# EAGLE board rev2ctrl (EAGLE 7.4.0)
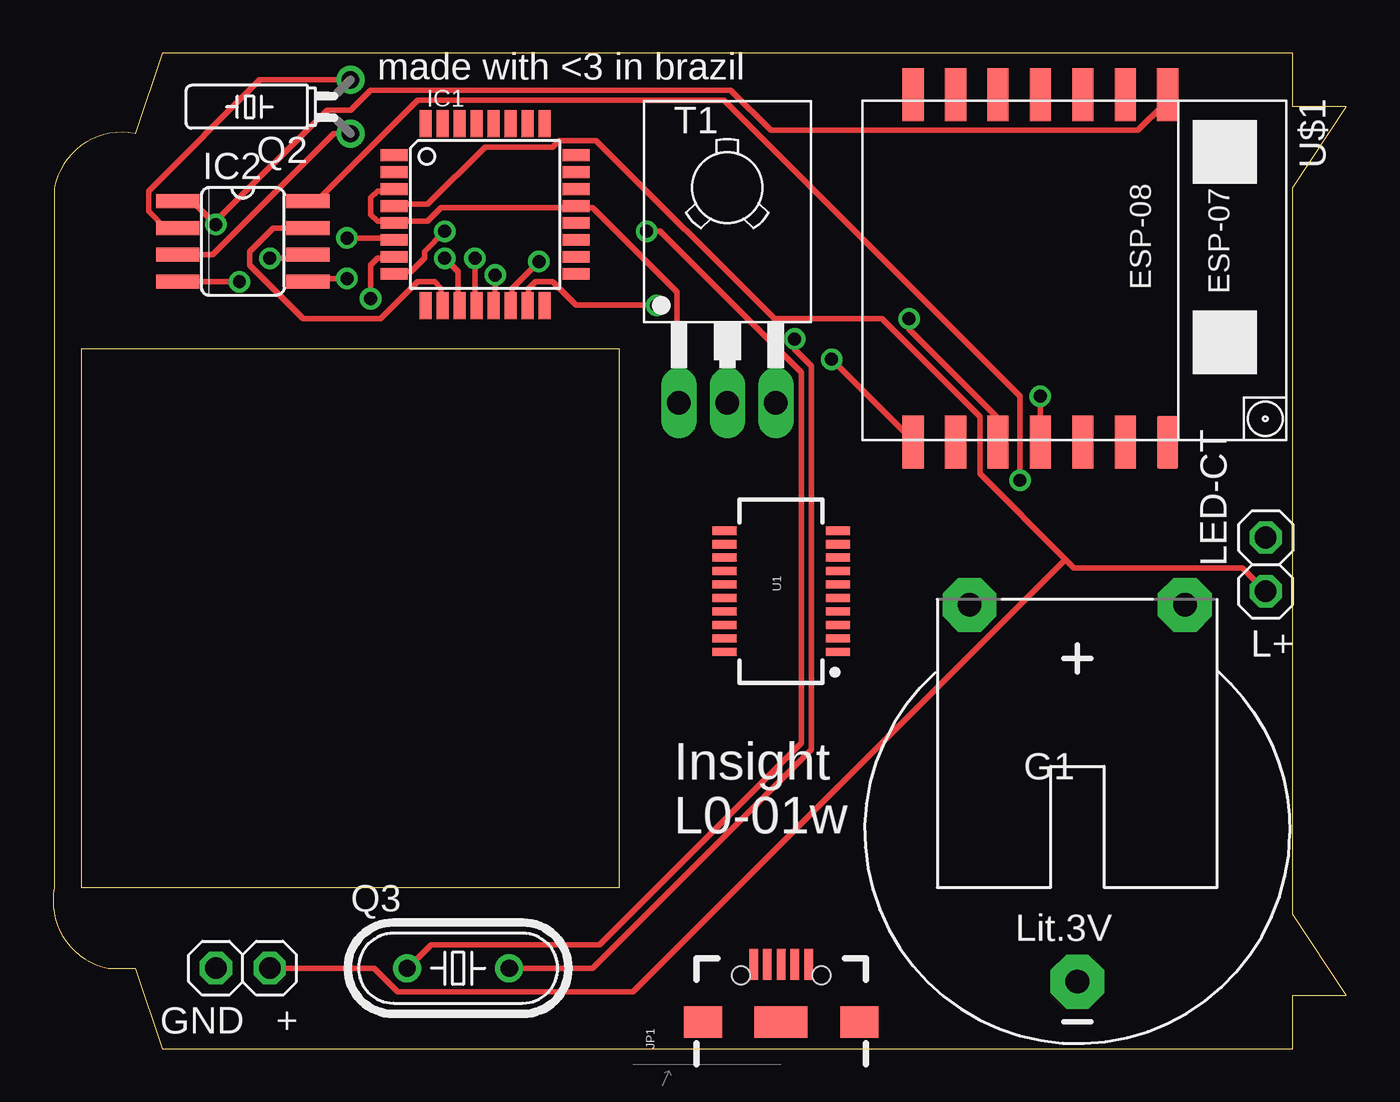
[diagram p0: board, top side]
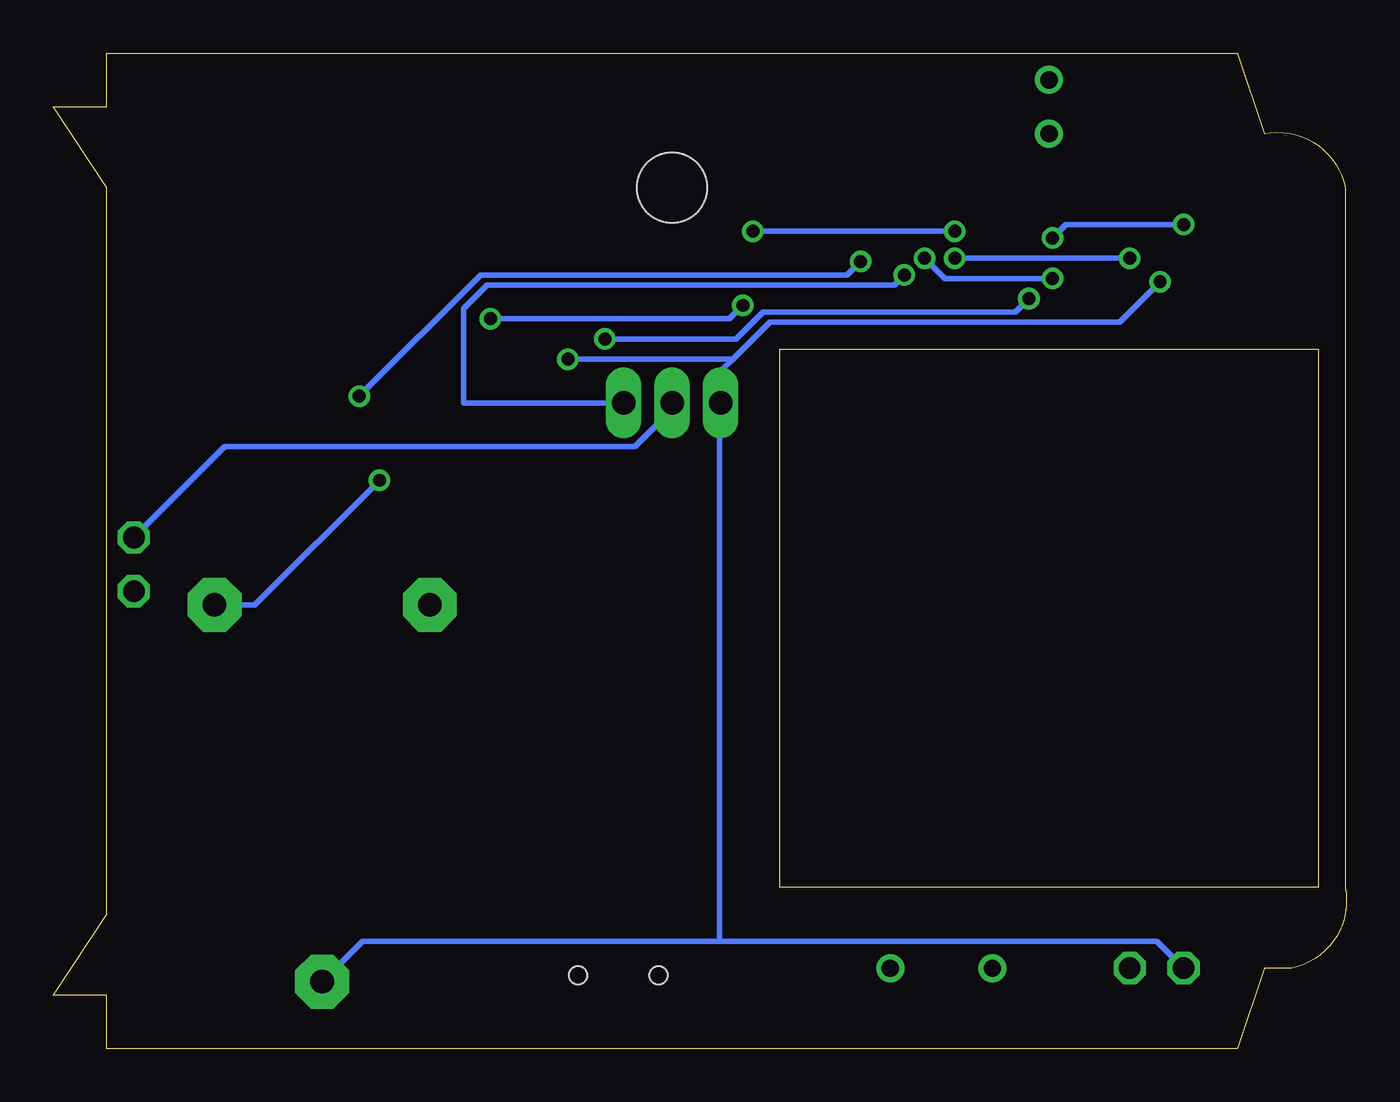
[diagram p1: board, bottom side, seen from below]

Size 61.02 x 46.99 mm. Coordinates in mm from the lower left corner, seen from the top.
Outline: 58.48,46.99 5.14,46.99 3.87,43.18 arc90 0.06,40.64 0.06,7.62 arc90 2.6,3.81 3.87,3.81 5.14,0 58.48,0 58.48,2.54 61.02,2.54 58.48,6.35 58.48,40.64 61.02,44.45 58.48,44.45 58.48,46.99
Copper layers (1*16): Top 0.035mm / dielectric 1.5mm / Bottom 0.035mm
Design rules "default": minimum track width 10mil, minimum drill 24mil, track to track 8mil, track to pad 8mil, pad to pad 8mil, via to via 8mil, smd to smd 8mil, copper to edge 40mil, drill to drill 8mil, minimum pad ring 10mil, minimum via ring 8mil, stop-mask expansion 4mil, vias tented up to drill 0mil, thermal gap 10mil

## Footprints (pad centres in the part's own frame; a part is rotated, then mirrored left to right if it is on the bottom)
1X01 = drill 1.016 octagon: 1 0,0
CR2032H = drill 1.118 pad 2.54 octagon: + 5.08,10.795; +@1 -5.08,10.795; - 0,-6.985
TQFP32-08 = smd 1.27 x 0.559: 1 -4.293,2.8; 2 -4.293,2; 3 -4.293,1.2; 4 -4.293,0.4; 5 -4.293,-0.4; 6 -4.293,-1.2; 7 -4.293,-2; 8 -4.293,-2.8; 17 4.293,-2.8; 18 4.293,-2; 19 4.293,-1.2; 20 4.293,-0.4; 21 4.293,0.4; 22 4.293,1.2; 23 4.293,2; 24 4.293,2.8 | smd 0.559 x 1.27: 9 -2.8,-4.293; 10 -2,-4.293; 11 -1.2,-4.293; 12 -0.4,-4.293; 13 0.4,-4.293; 14 1.2,-4.293; 15 2,-4.293; 16 2.8,-4.293; 25 2.8,4.293; 26 2,4.293; 27 1.2,4.293; 28 0.4,4.293; 29 -0.4,4.293; 30 -1.2,4.293; 31 -2,4.293; 32 -2.8,4.293
SO08 = smd 0.66 x 2.032: 1 -1.905,-3.073; 2 -0.635,-3.073; 3 0.635,-3.073; 4 1.905,-3.073; 5 1.905,3.073; 6 0.635,3.073; 7 -0.635,3.073; 8 -1.905,3.073
USB-B-MICRO-SMD_V03 = smd 1.45 x 0.4: D+1 2.725,0; D-1 2.725,0.65; GND1 2.725,-1.3; ID1 2.725,-0.65; VBUS1 2.725,1.3 | smd 1.5 x 1.8: SHIELD1 0,3.685; SHIELD2 0,-3.685 | smd 1.5 x 2.5: SHIELD3 0,0 | hole 0.85: 2.2,1.9; 2.2,-1.9
TC26H = drill 0.813: 1 -1.27,0; 2 1.27,0
HC49/S = drill 0.813: 1 -2.413,0; 2 2.413,0
TO126 = drill 1.118 long: 1 -2.286,-5.08; 2 0,-5.08; 3 2.286,-5.08 | hole 3.302: 0,5.08
SSOP20_L = smd 0.381 x 1.143: 1 -2.857,-2.68; 2 -2.223,-2.68; 3 -1.587,-2.68; 4 -0.953,-2.68; 5 -0.318,-2.68; 6 0.318,-2.68; 7 0.953,-2.68; 8 1.587,-2.68; 9 2.223,-2.68; 10 2.857,-2.68; 11 2.857,2.68; 12 2.223,2.68; 13 1.587,2.68; 14 0.953,2.68; 15 0.318,2.68; 16 -0.318,2.68; 17 -0.953,2.68; 18 -1.587,2.68; 19 -2.223,2.68; 20 -2.857,2.68
ESP07 = smd 2.5 x 1: ANT 8.2,6.8; CH_PD 8.2,4.8; GND 8.2,-5.2; GPIO0 -8.2,-5.2; GPIO2 -8.2,-3.2; GPIO12 -8.2,2.8; GPIO13 -8.2,0.8; GPIO14 -8.2,4.8; GPIO15 -8.2,-1.2; GPIO16 8.2,2.8; NC 8.2,-3.2; RX 8.2,0.8; TX 8.2,-1.2; VCC -8.2,6.8

## Placement (x,y rotation side)
+  [1X01]  10.22,3.81 180 top
G1  CR2032H  [CR2032H]  48.32,10.16 0 top
GND  [1X01]  7.68,3.81 180 top
IC1  MEGA8-AI  [TQFP32-08]  20.38,39.37 0 top
IC2  DS1621S  [SO08]  8.95,38.1 270 top
JP1  [USB-B-MICRO-SMD_V03]  34.35,1.27 90 top
L+  [1X01]  57.21,21.59 180 top
LED-CT  [1X01]  57.21,24.13 90 top
Q2  [TC26H]  14.03,44.45 90 top
Q3  [HC49/S]  19.11,3.81 0 top
T1  BD677  [TO126]  31.81,35.56 0 top
U1  FTS31XS-U  [SSOP20_L]  34.35,21.59 90 top
U$1  ESP07  [ESP07]  45.78,36.83 270 top

## Library data of the parts
+ GND L+ LED-CT = pinhead
G1 = battery
IC1 = atmel; MPN: ATMEGA8-16AU; OC_FARNELL: 9171371; OC_NEWARK: 73M8863
IC2 = maxim; MF: DALLAS SEMICONDUCTOR; MPN: DS1621S+; OC_FARNELL: 9725261; OC_NEWARK: 23K3501
JP1 = SparkFun-Connectors; PROD_ID: CONN-11752
Q2 = crystal; OC_FARNELL: unknown; OC_NEWARK: unknown
Q3 = crystal; OC_FARNELL: 1667008; OC_NEWARK: unknown
T1 = transistor
U1 = SparkFun-DigitalIC; PROD_ID: IC-11524
U$1 = esp8266modules

## Nets
AVCC: IC1.18
GND: G1.- GND.1 IC1.3 IC1.5 IC1.21 IC2.4 T1.1 U$1.GND
N$1: IC1.7 Q3.2
N$2: IC1.8 Q3.1
N$3: IC2.3 Q2.1
N$4: IC2.2 Q2.2
N$6: G1.+ IC2.8
N$7: IC1.30
N$9: IC1.15 U$1.TX
N$10: IC1.13 T1.3
N$11: IC1.10 IC2.7
N$12: LED-CT.1 T1.2
N$13: IC1.11 IC2.6
N$14: IC1.12 IC2.5
N$15: IC1.14 U$1.RX
N$16: +.1 IC1.4 L+.1
VCC: IC1.6 IC2.1 U$1.VCC

## Tracks (layer width: path | path; a pad name or v marks a point on that pad's centre or on a via)
GND  (via drill 0.61)
  Top 0.254: IC1.3 15.94,40.48 15.3,40.48 14.98,40.16 14.98,39.37 15.3,39.05 15.94,39.05 IC1.5 16.1,39.05 17.68,39.05 18.32,39.69 24.67,39.69 IC1.21 24.83,39.69 25.46,39.69 29.43,35.72 29.43,30.48 T1.1 | v8.79,36.2 IC2.4 | v36.73,32.54 40.54,28.73 U$1.GND
  Bottom 0.254: v8.79,36.2 10.7,34.29 27.21,34.29 29.03,32.46 | 29.03,32.46 29.43,32.07 29.43,30.48 T1.1 29.59,30.48 29.59,5.08 | v36.73,32.54 29.11,32.54 29.03,32.46 | GND.1 8.95,5.08 29.59,5.08 | 29.59,5.08 46.42,5.08 G1.-
N$1  (via drill 0.61)
  Top 0.254: v14.98,35.4 14.98,36.99 15.3,37.31 15.94,37.31 IC1.7 | v34.99,33.5 34.99,33.02 35.78,32.23 35.78,14.13 25.46,3.81 Q3.2
  Bottom 0.254: v14.98,35.4 15.62,34.77 27.53,34.77 28.8,33.5 v34.99,33.5
N$2  (via drill 0.61)
  Top 0.254: v18.48,38.58 17.52,37.62 17.52,37.31 16.89,36.67 16.1,36.67 IC1.8 | v28,38.58 28.64,38.58 35.3,31.91 35.3,14.45 25.78,4.92 17.84,4.92 16.73,3.81 Q3.1
  Bottom 0.254: v28,38.58 v18.48,38.58
N$3
  Top 0.254: IC2.3 7.52,37.46 13.24,43.18 Q2.1
N$4
  Top 0.254: IC2.2 5.3,38.73 4.51,39.53 4.51,40.48 9.75,45.72 Q2.2
N$6  (via drill 0.61)
  Top 0.254: IC2.8 12.45,40 17.21,44.77 31.65,44.77 45.62,30.8 v45.62,26.83
  Bottom 0.254: v45.62,26.83 51.5,20.96 G1.+
N$9  (via drill 0.61)
  Top 0.254: v28.48,35.08 24.67,35.08 23.56,36.2 22.76,36.2 22.45,35.88 22.45,35.08 IC1.15 | v40.38,34.45 40.38,33.97 44.51,29.84 44.51,28.73 U$1.TX
  Bottom 0.254: v28.48,35.08 29.11,34.45 v40.38,34.45
N$10  (via drill 0.61)
  Top 0.254: v20.86,36.51 20.86,35.08 IC1.13
  Bottom 0.254: v20.86,36.51 21.34,36.04 40.54,36.04 41.66,34.92 41.66,30.48 T1.3
N$11
  Top 0.254: IC2.7 10.38,38.73 9.27,37.62 9.27,36.99 11.81,34.45 15.46,34.45 17.21,36.2 18,36.2 18.32,35.88 18.32,35.08 IC1.10
N$12
  Bottom 0.254: LED-CT.1 52.93,28.42 33.56,28.42 31.81,30.16 T1.2
N$13  (via drill 0.61)
  Top 0.254: v18.48,37.31 19.11,36.67 19.11,35.08 IC1.11 | v10.22,37.31 11.81,37.31 11.97,37.46 IC2.6
  Bottom 0.254: v10.22,37.31 v18.48,37.31
N$14  (via drill 0.61)
  Top 0.254: v19.91,37.31 19.91,35.08 IC1.12 | v13.87,36.35 12.29,36.35 12.13,36.2 IC2.5
  Bottom 0.254: v19.91,37.31 18.95,36.35 v13.87,36.35
N$15  (via drill 0.61)
  Top 0.254: v22.92,37.15 21.65,35.88 21.65,35.08 IC1.14 | v46.58,30.8 46.58,28.73 U$1.RX
  Bottom 0.254: v22.92,37.15 23.56,36.51 40.86,36.51 v46.58,30.8
N$16
  Top 0.254: 47.77,23.1 48.16,22.7 56.1,22.7 L+.1 | 47.77,23.1 43.72,27.15 43.72,29.84 39.12,34.45 34.03,34.45 25.62,42.86 23.87,42.86 23.56,42.54 20.38,42.54 17.68,39.85 16.1,39.85 IC1.4 | +.1 15.14,3.81 16.25,2.7 27.37,2.7 47.77,23.1
VCC  (via drill 0.61)
  Top 0.254: v13.87,38.26 15.94,38.26 IC1.6 | IC2.1 6.57,40 v7.68,38.89 7.68,39.05 12.92,44.29 14.03,44.29 14.98,45.24 31.97,45.24 33.88,43.34 51.18,43.34 52.45,44.61 52.45,44.93 U$1.VCC
  Bottom 0.254: v13.87,38.26 13.24,38.89 v7.68,38.89

## Text on the board
tPlace: made with <3 in brazil | Insight | L0-01w